# Altium PCB RotaryDebouncerTop.PcbDoc
Units mil, origin at the board's own origin, x right, y up, seen from the top; angles counter-clockwise.
Board outline 3690 x 2350 mil, 2 copper layers (Top Layer, Bottom Layer); 16 components, 10 nets, 49 pads, 4 vias.
Unrouted connection lines stored in the file: 1.
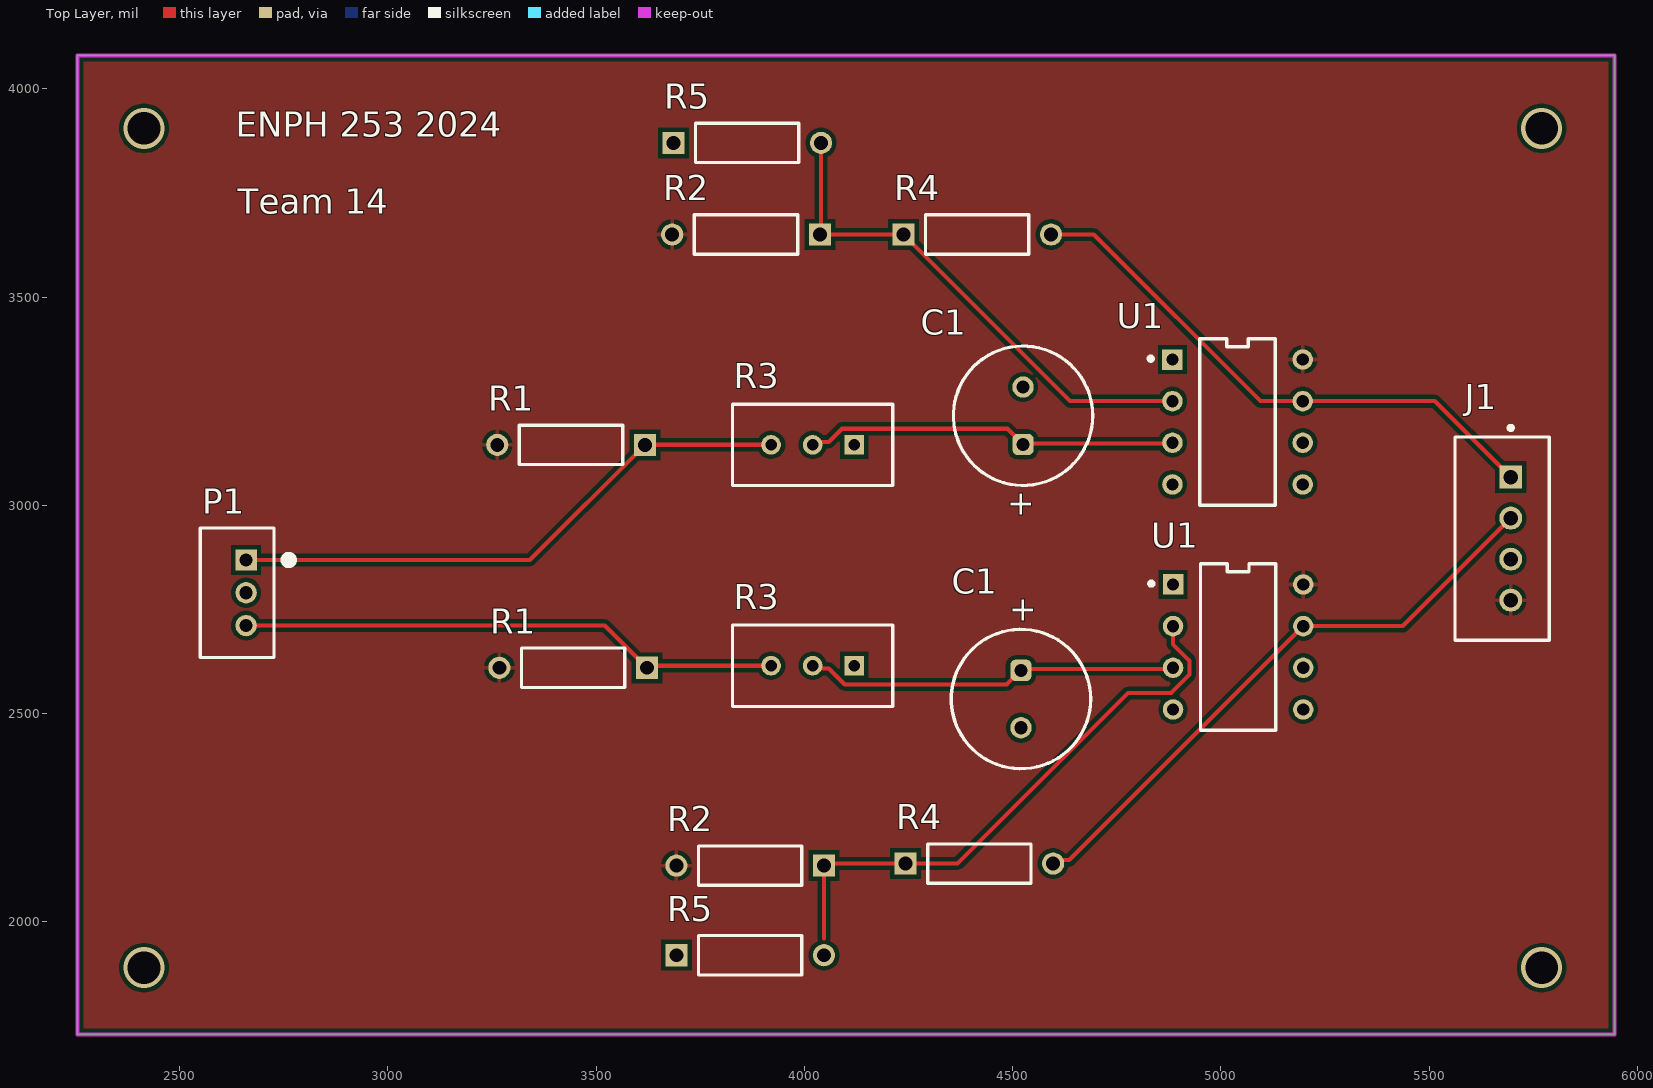
[diagram p0: Top Layer view]
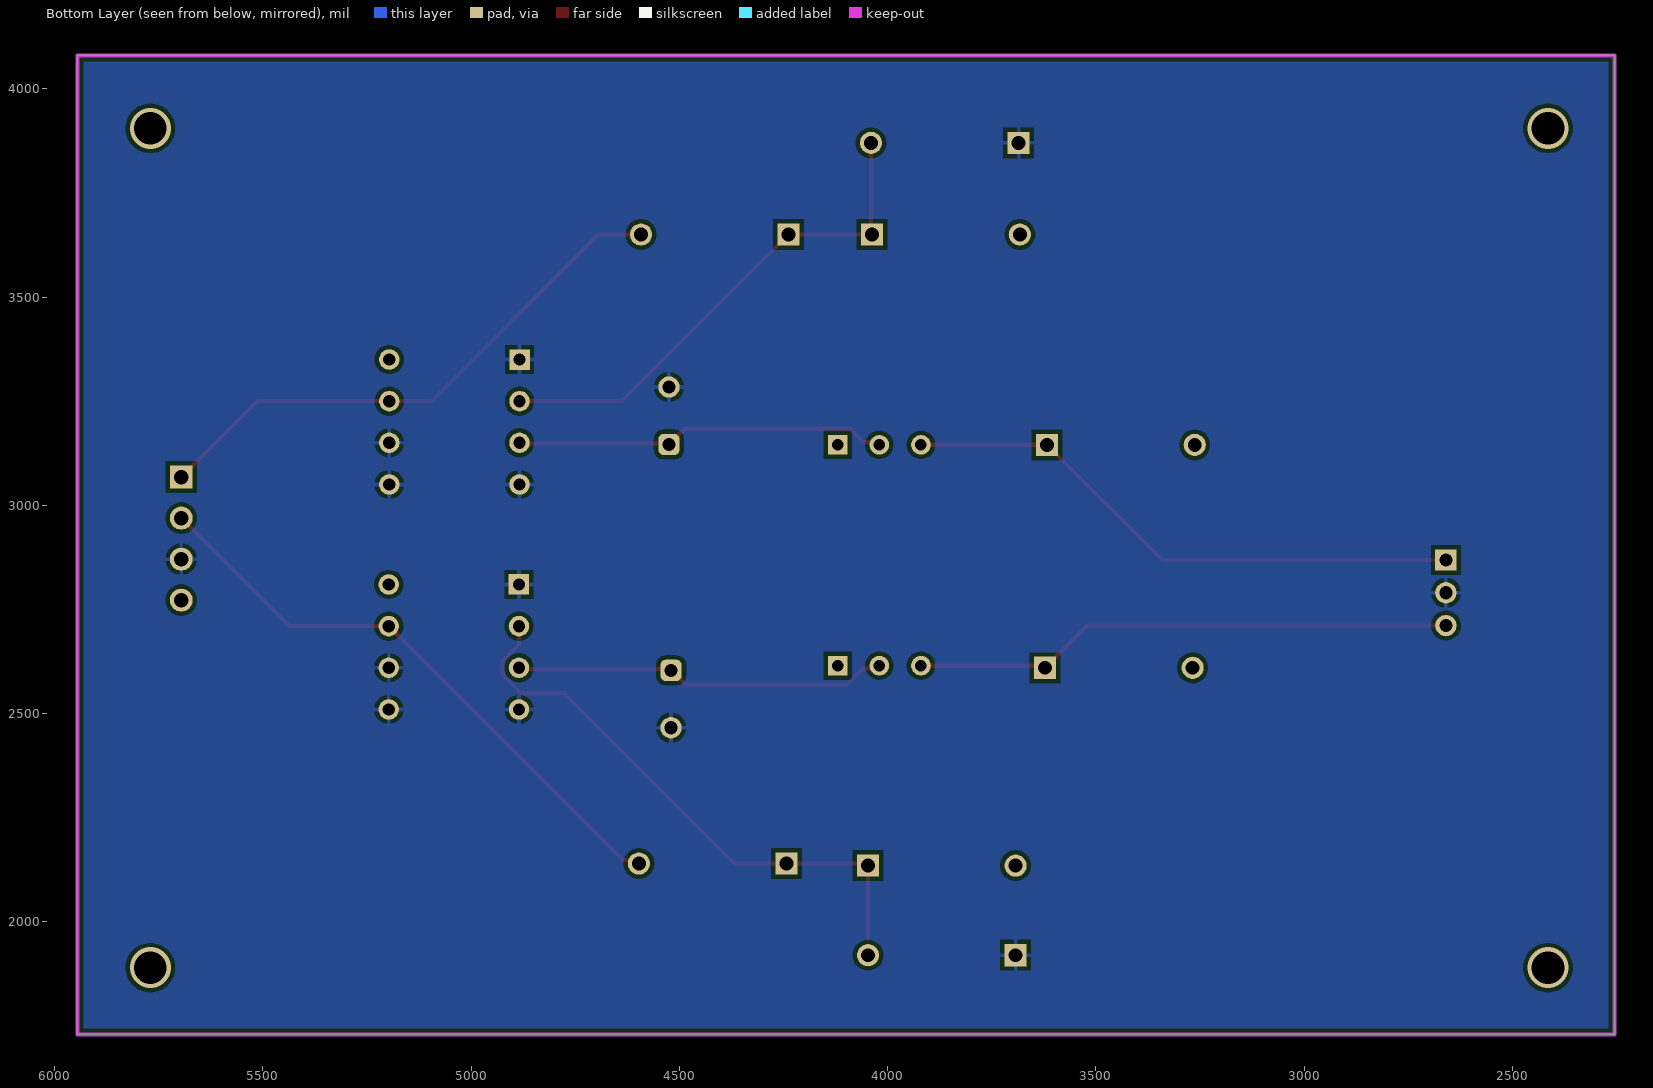
[diagram p1: Bottom Layer view, seen from below]

## Layer stack, top to bottom
Top Solder: solder mask 0.4, Solder Resist, Dk 3.5
Top Layer: signal copper 1.4
Dielectric 1: dielectric 12.6, FR-4, Dk 4.8
Bottom Layer: signal copper 1.4
Bottom Solder: solder mask 0.4, Solder Resist, Dk 3.5

## Board outline
2255,1730 5945,1730 5945,4080 2255,4080

## Design rules (kind name [scope] priority, off if disabled: settings)
Clearance [All] p1: gap=10 ignorepadtopadclearanceinfootprint=FALSE
PolygonConnect [All] p1: connectstyle=Relief reliefconductorwidth=10 reliefentries=4 polygonreliefangle="90 Angle" airgapwidth=10
RoutingVias [All] p1: holewidth=28 width=50 viastyle="Through Hole" minholewidth=28 minwidth=50 maxholewidth=28 maxwidth=50
SolderMaskExpansion [All] p1: expansion=4 istentingtop=FALSE
SupplyNets "Schematic Supply Nets_1" [InNet('GND')] p1: voltage=0.000
SupplyNets "Schematic Supply Nets" [InNet('+5')] p2: voltage=0.000
Width [All] p1: maxlimit=10 minlimit=10 preferedwidth=10
30 further rules are at their usual default settings.

## Classes and differential pairs
channel class RotaryDebouncer: U_RotaryDebouncer1 U_RotaryDebouncer2
component class U_RotaryDebouncer2: C1 R1 R2 R3 R4 R5 U1
component class U_RotaryDebouncer1: C1 R1 R2 R3 R4 R5 U1
component class RotaryDebouncerTop: J1 P1

## Components (designator, comment, footprint, x,y, rotation, side; value= is the part's Value field where it differs from the comment)
C1 "60240474005" WCAP-AT1H_D8H11.5 4520,2535 r90 top
C1 "60240474005" WCAP-AT1H_D8H11.5 4525,3215 r270 top
J1 "B4B-XH-A(LF)(SN)" FP-B4B-XH-A_LF_SN-MFG 5675,2920 r90 top
P1 "B3B-PH-K-S(LF)(SN)" JST-B3B-PH-K-S-3_V 2638.35,2790 r270 top
R1 "47K" RESA60-630X240 3445,2610 r180 top
R1 "47K" RESA60-630X240 3440,3145 r180 top
R2 "47K" RESA60-630X240 3870,2135 r180 top
R2 "47K" RESA60-630X240 3860,3650 r180 top
R3 "10K" FP-3296W-MFG 4020,2614.8 r90 top
R3 "10K" FP-3296W-MFG 4020,3145 r90 top
R4 "47K" RESA60-630X240 4420,2140 r0 top
R4 "47K" RESA60-630X240 4415,3650 r0 top
R5 "47K" RESA60-630X240 3870,1920 r0 top
R5 "47K" RESA60-630X240 3862.83,3870 r0 top
U1 "LM311P" FP-P0008A-MFG 5041.3,2660 r0 top
U1 "LM311P" FP-P0008A-MFG 5040,3200 r0 top

## Footprints (in the part's own frame and the unit in brackets; to place one, negate y for a bottom-side part, rotate by r counter-clockwise, add the part's x,y. Pads: shape width x height; smd on the part's side, far side on the other; paste and mask are expansions set on the pad)
FP-3296W-MFG [mm]
  rect 1.2x1.2 hole 0.7 paste-2539.97 mask+0: 1(0.005,-2.54)
  round 1.2 hole 0.7 paste-2539.97 mask+0: 2(0.005,0) 3(0.005,2.54)
  silkscreen extent -2.48,-4.89 2.48,4.89, body extent -2.58,-4.99 2.58,4.99, height 0.25
FP-B4B-XH-A_LF_SN-MFG [mm]
  rect 1.4x1.4 hole 0.9 paste-2539.97 mask+0: 1(3.75,-0.525)
  round 1.4 hole 0.9 paste-2539.97 mask+0: 2(1.25,-0.525) 3(-1.25,-0.525) 4(-3.75,-0.525)
  silkscreen extent -6.2,-2.88 6.87,2.88, body extent -6.3,-2.98 6.3,2.98, height 0.25
FP-P0008A-MFG [mm]
  rect 1.25x1.25 hole 0.75 paste-2539.97 mask+0: 1(-3.97,3.81)
  round 1.25 hole 0.75 paste-2539.97 mask+0: 2(-3.97,1.27) 3(-3.97,-1.27) 4(-3.97,-3.81) 5(3.97,-3.81) 6(3.97,-1.27) 7(3.97,1.27) 8(3.97,3.81)
  silkscreen extent -5.42,-5.08 2.3,5.08, body extent -4.69,-5.18 4.69,5.18, height 0.25
JST-B3B-PH-K-S-3_V [mm] "Connector, 3-Leads, Body 7.9x4.5mm, Pitch 2mm"
  rect 1.3x1.3 hole 0.8: 1(-2,0.55)
  round 1.3 hole 0.8: 2(0,0.55) 3(2,0.55)
  silkscreen extent -3.95,-2.25 3.95,3.4, body extent -3.95,-2.25 3.95,2.25, height 6
RESA60-630X240 [mm] "Axial Resistor, 2-Leads, Dia 2.4mm, Body Length 6.3mm"
  rect 1.35x1.35 hole 0.85: 1(-4.5,0)
  round 1.35 hole 0.85: 2(4.5,0)
  silkscreen extent -3.15,-1.2 3.15,1.2, body extent -3.15,-1.2 3.15,1.2, height 2.4
WCAP-AT1H_D8H11.5 [mm] "Aluminium Electrolytic Radial THD Capacitors, 8x11.5mm"
  rrect50% 1.3x1.3 hole 0.8: 1(1.75,0)
  round 1.3 hole 0.8: 2(-1.75,0)
  silkscreen extent -4.25,-4.25 4.25,4.25, body extent -3.99,-4 4,4, height 11.76

## Part data
C1 C1: library part CMP-03913-53758680-1, "860240474005 WCAP-AT1H Aluminum Electrolytic Capacitors", Capacitance=100µF, Case/Package=Radial, Leakage Current=25µA, Max Operating Temperature=105°C, Min Operating Temperature=-40°C, Ripple Current=327mA, Tolerance=20%, Voltage Rating=25V, Diameter=8mm, Height=11.5mm, Lead Pitch=3.5mm, Length=11.5mm, Life (Hours)=8000hours, NexarPartId=53758680, Pitch=3.5mm, REACH SVHC=Unknown, RoHS=Non-Compliant, Voltage Rating (DC)=25V
J1: library part CMP-17439-000250-1, "CONN HEADER VERT 4POS 2.5MM", Color=Natural, Contact Resistance=20mR, Current Rating=3A, Flammability Rating="UL94 V-0", Housing Color=White, Insulation Resistance=1GR, Max Operating Temperature=85°C, Max Voltage Rating (AC)=250V, Min Operating Temperature=-25°C, Package Quantity=500, Connector Type=Header, Contact Finish - Mating=TIN, Contact Material=Brass, Contact Plating=Tin, Contact Shape=Square, Contact Type="Male Pin", Depth=5.75mm, Fastening Type=Detent, Gender=Male, Housing Material=Polyamide, Insulation Color=Natural, Insulation Material=Nylon, Lead Free="Lead Free", Lead Pitch=2.5mm, Length=12.4mm, Mated Stacking Heights=9.8mm, Material=Polyamide, Max Current Rating=3A, Max Voltage Rating (DC)=250V, Mount="Through Hole", Number of Contacts=4, Number of Positions=4, Number of Rows=1, Orientation=Straight, Packaging=Bulk, Pitch=2.5mm, REACH SVHC="No SVHC", Series=XH, Termination=Solder, Voltage Rating=250V, Voltage Rating (AC)=250V, Wire/Cable Gauge=22AWG
P1: library part CMP-2000-05164-1, "Male Header, Pitch 2 mm, 1 x 3 Position, Height 6 mm, Tail Length 3.4 mm, -25 to 85 degC, RoHS, Bulk", Manufacturer=JST, Datasheet URL=https://datasheet.ciiva.com/11746/0900766b80826550-11746939.pdf, Datasheet Version=Oct-06, Manufacturer URL=http://www.jst.com/home2.html, No of Positions=3, Pitch=2mm, Style/Orientation=StraightHeader/Plug, Termination=Crimp, Type=ShroudedHeader
R1 R1 R2 R2 R4 R4 R5 R5: library part CMP-1659-00073-1, "Axial Resistor, 100 KOhm, +/- 1%, 0.25 W, -55 to 155 degC, 2-Pin THD, RoHS, Bulk", Case\Package=Axial, Max Operating Temperature="155 degC", Min Operating Temperature="-55 degC", Package Quantity=200, Power Rating="250 mW", Resistance="475 Ohm", Tolerance=1%, Voltage Rating="250 V", ComponentLink1Description="Manufacturer URL", ComponentLink1URL=http://www.yageo.com/, ComponentLink2Description=Datasheet, ComponentLink2URL=http://www.yageo.com/documents/recent/Yageo%20LR_MFR_2013.pdf, DatasheetVersion=Apr-13, Length="0.248 inch", Mount="Through Hole", PackageDescription="2-Pin Axial Lead, Dia 2.4 mm, Body Length 6.3 mm", PackageReference=MFR-25, Packaging=Bulk, RoHSCompliant=true
R3 R3: library part CMP-2000-05582-2, "TRIMMER 2K OHM 0.5W PC PIN TOP", Color=Blue, Max Operating Temperature=125°C, Max Power Dissipation=500mW, Min Operating Temperature=-55°C, Package Quantity=50, Resistance=2kR, Resistance Tolerance=10%, Resistor Type=Cermet, Temperature Coefficient=100ppm/°C, Contact Plating=Tin, Depth=4.83mm, Height=0.395inch, Lead Free="Lead Free", Length=9.53mm, Military Standard=Not, Mount=Panel, Number of Turns=25, Packaging=Rail/Tube, Power Rating=500mW, Radiation Hardening=No, REACH SVHC="No SVHC", RoHS Compliant=Yes, Series=3296, Taper=Linear, Technology=CERMET, Termination=Pin, Tolerance=10%, Weight=0.03oz, Width=9.53mm
U1 U1: library part CMP-1685-00016-2, Ambient Temperature Range High=70°C, Case Code (Imperial)=0603, Case Code (Metric)=1608, Case/Package=PDIP, Dual Supply Voltage=9V, Input Bias Current=250nA, Input Offset Voltage (Vos)=2mV, Manufacturer Lifecycle Status=ACTIVE, Max Dual Supply Voltage=15V, Max Junction Temperature (Tj)=150°C, Max Output Voltage=7.5mV, Max Power Dissipation=500mW, Max Supply Current=7.5mA, Max Supply Voltage=30V, Min Dual Supply Voltage=1.75V, Min Operating Temperature=0°C, Min Supply Voltage=3.5V, Operating Supply Voltage=28V, Output Current=50mA, Power Rating=100mW, Resistance=390Ω, Tolerance=1%, Voltage Gain=106.02dB, Voltage Rating=75V, Contact Plating=Gold, Height=5.08mm, Lead Free="Lead Free", Length=9.81mm, Lifecycle Status=Production, Max Input Current=250nA, Max Operating Temperature=70°C, Mount="Surface Mount, Through Hole", NexarPartId=24336, Nominal Supply Current=7.5mA, Number of Channels=1, Number of Circuits=1, Number of Elements=1, Number of Pins=8, Output Current per Channel=50mA, Output Type=TTL, Packaging="Tape and Reel", Propagation Delay=115ns, Quiescent Current=7.5mA, Radiation Hardening=No, REACH SVHC="No SVHC", Response Time=165ns, RoHS=Compliant, Schedule B="8542390000, 8542390000", Thickness=3.9mm, Turn-On Delay Time=115ns, Type="General Purpose", Weight=2.012816mg, Width=6.35mm

## Via types
v1: diameter 98.43, hole 78.74, Top Layer to Bottom Layer, 4 vias

## Nets (pads, with @x,y where several pads share a name; then routed paths per layer and width w, separated by ;. In a path a pad name is that pad's centre, name@x,y a point inside that pad or via, vN(x,y) a via of type N, cw(c..) or ccw(c..) an arc to the next point about the centre after c; other vN are vias at no path point)
+5: J1.4 R1.2 R2.2 U1.8
GND: C1.2 J1.3 P1.2 R5.1 U1.1 U1.4 U1.5 U1.6
NetC1_U_RotaryDebouncer1_1: C1.1@4525,3146.1 R3.2@4020,3145.2 U1.3@4883.7,3150 | length 896.9
  Top Layer w10: R3.2@4020,3145.2 4027.08,3152.28 4058.62,3152.28 4090.16,3183.82 4487.28,3183.82 4525,3146.1 4526.95,3148.05 4881.75,3148.05 U1.3@4883.7,3150
NetC1_U_RotaryDebouncer2_1: C1.1@4520,2603.9 R3.2@4020,2615 U1.3@4885,2610 | length 900.5
  Top Layer w10: R3.2@4020,2615 4027.08,2607.92 4058.62,2607.92 4096.91,2569.63 4485.73,2569.63 4520,2603.9 4523.05,2606.95 4881.95,2606.95 U1.3@4885,2610
NetJ1_1: J1.1 R4.2@4592.17,3650 U1.7@5196.3,3250 | length 1344.7
  Top Layer w10: R4.2@4592.17,3650 4694.76,3650 5094.76,3250 5196.3,3250 5513.31,3250 J1.1
NetJ1_2: J1.2 R4.2@4597.17,2140 U1.7@5197.6,2710 | length 1442
  Top Layer w10: R4.2@4597.17,2140 4605.42,2148.26 4635.85,2148.26 5197.6,2710 5436.46,2710 J1.2
NetP1_1: P1.1 R1.1@3617.17,3145 R3.3@3920,3145.2 | length 1374.5
  Top Layer w10: P1.1 3340.91,2868.74 3617.17,3145 3617.36,3145.2 R3.3@3920,3145.2
NetP1_3: P1.3 R1.1@3622.17,2610 R3.3@3920,2615 | length 1304
  Top Layer w10: P1.3 3520.91,2711.26 3622.17,2610 3627.17,2615 R3.3@3920,2615
NetR2_U_RotaryDebouncer1_1: R2.1@4037.17,3650 R4.1@4237.83,3650 R5.2@4040,3870 U1.2@4883.7,3250 | length 1233.4
  Top Layer w10: R5.2@4040,3870 4040,3652.83 4037.17,3650 4237.83,3650 4637.83,3250 U1.2@4883.7,3250
NetR2_U_RotaryDebouncer2_1: R2.1@4047.17,2135 R4.1@4242.83,2140 R5.2@4047.17,1920 U1.2@4885,2710 | length 1375.2
  Top Layer w10: 4047.17,1960 4047.17,2135 4052.17,2140 4242.83,2140 4367.71,2140 4777.32,2549.61 4880.62,2549.61 4924.61,2593.59 4924.61,2626.69 4885,2666.29 U1.2@4885,2710
pads on no net: R3.1
copper on no net:
  other v1: 2415,1890 5770,1890 2415,3905 5770,3905

## Polygon pours and split planes (outlines as drawn)
+5 on Top Layer "+5_L01_P000" (solid, pour order 0): 2255,4080 5945,4080 5945,1730 2255,1730
GND on Bottom Layer "GND_L02_P001" (solid, pour order 1): 2255,4080 5945,4080 5945,1730 2255,1730

## Keep-outs
Keep-Out Layer:
  the board outline again, w10

## Silkscreen, mask and mechanical layers (free items; w line width, h text height)
Top Overlay:
  text "ENPH 253 2024" at 2635,3885 h60
  text "Team 14" at 2640,3700 h60

## Text inside footprints (layer, text, board x,y; h text height)
C1: Top Overlay "+" at 4495.47,3035.87 h59.06 r270
C1: Top Overlay "+" at 4549.53,2714.13 h59.06 r90